# Altium PCB 003-00005.PcbDoc
Units mil, origin at the board's own origin, x right, y up, seen from the top; angles counter-clockwise.
Board outline 1076.1 x 992.63 mil, 2 copper layers (Top Layer, Bottom Layer); 3 components, 34 nets, 100 pads, 12 vias.
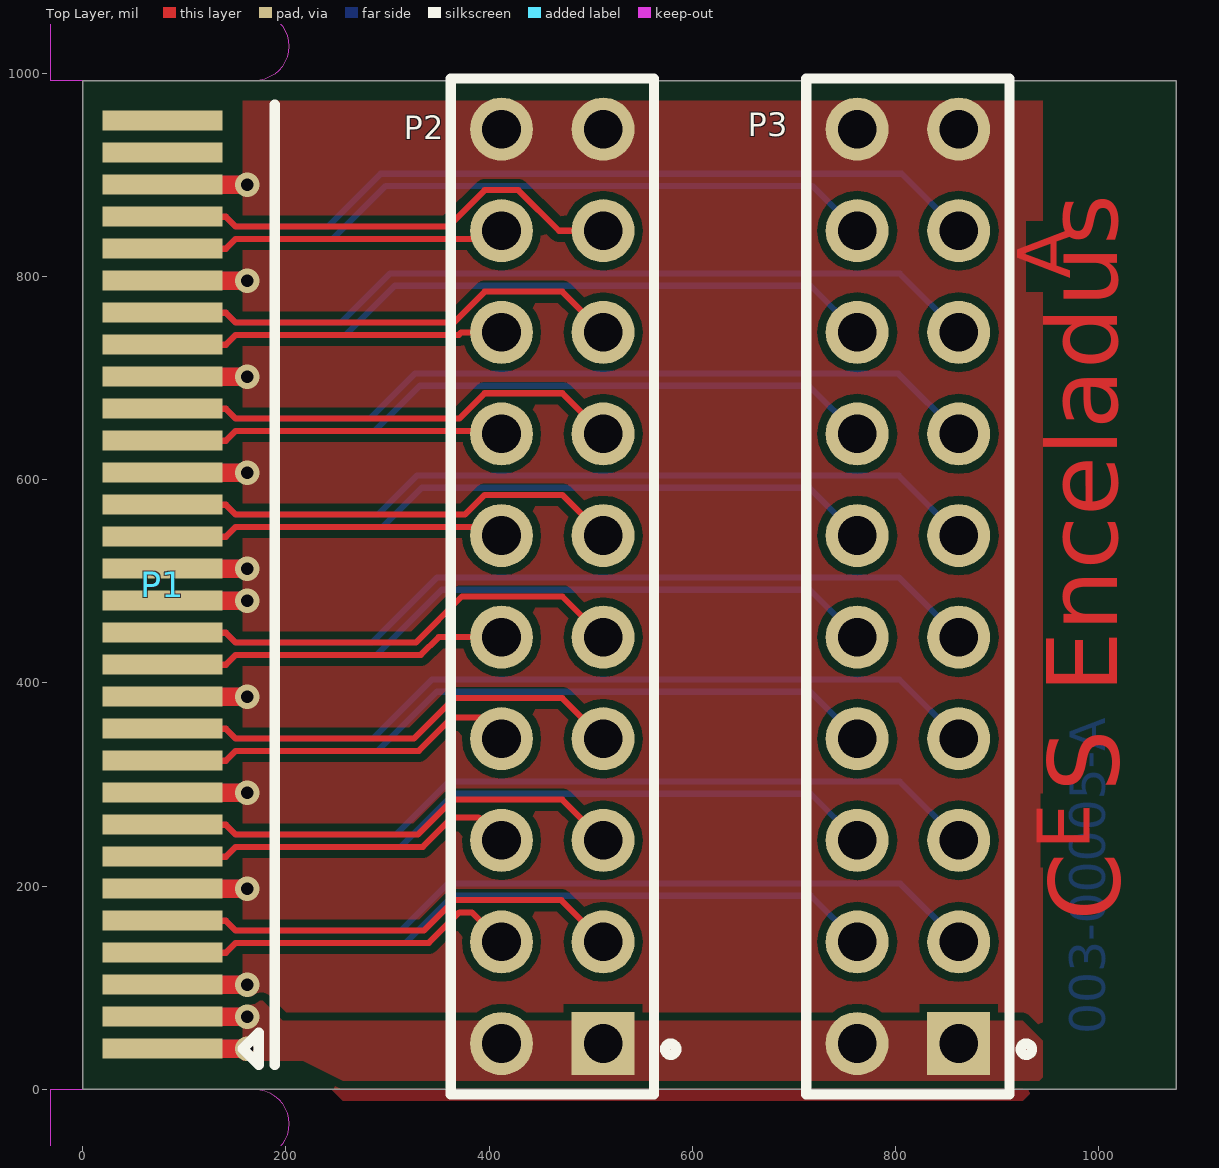
[diagram p0: Top Layer view]
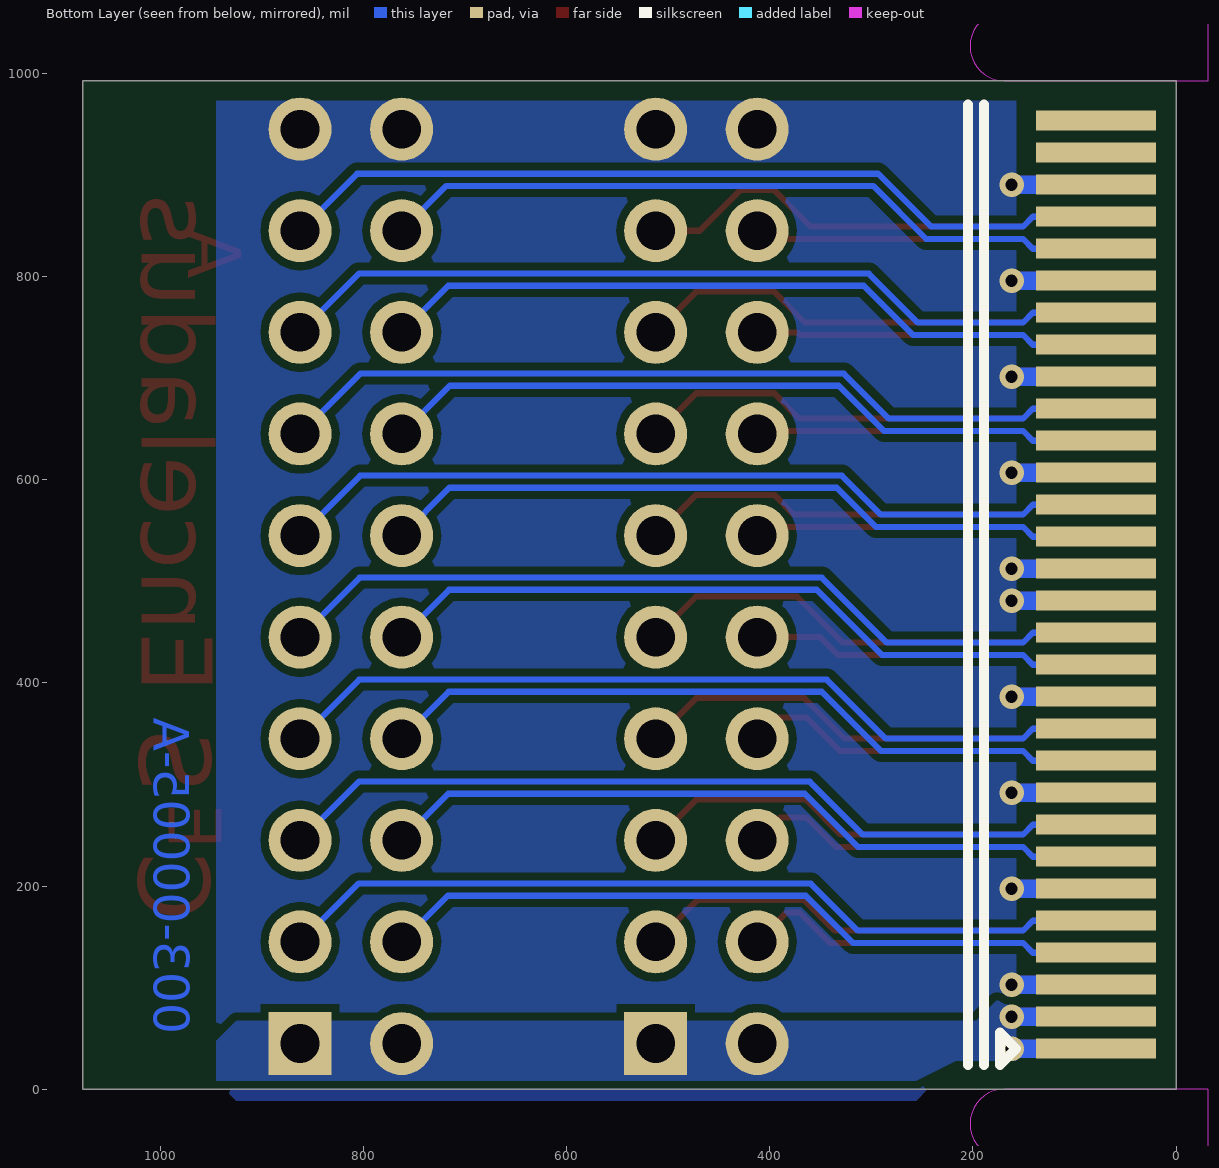
[diagram p1: Bottom Layer view, seen from below]

## Layer stack, top to bottom
Top Solder: solder mask 0.4, Solder Resist, Dk 3.5
Top Layer: signal copper 1.4
Dielectric1: core 12.6, FR-4, Dk 4.8
Bottom Layer: signal copper 1.4
Bottom Solder: solder mask 0.4, Solder Resist, Dk 3.5

## Board outline
0,0 1076.1,0 1076.1,992.63 0,992.63

## Design rules (kind name [scope] priority, off if disabled: settings)
Clearance Clearance_poly [InPolygon] p1: gap=8
Clearance [All] p2: gap=6
ComponentClearance [All] p1: gap=0 collisioncheckmode=3 verticalgap=0 showdistances=FALSE
DiffPairsRouting [All] p1: maxlimit=6 minlimit=6 mostfreqgap=6 toplayer_minwidth=6 toplayer_maxwidth=6 toplayer_prefwidth=6 bottomlayer_minwidth=6 bottomlayer_maxwidth=6 bottomlayer_prefwidth=6 maxuncoupledlength=500
HoleSize [All] p1: absolutevalues=TRUE maxlimit=500 minlimit=10 maxpercent=80.000 minpercent=20.000
HoleToHoleClearance [All] p1: gap=6 allowstackedmicrovias=TRUE
MinimumSolderMaskSliver [All] p1: minsoldermaskwidth=0
NetAntennae [not(InNet('PRSNTN'))] p1: netantennaetolerance=0
PlaneClearance [All] p1: clearance=10
PlaneConnect [All] p1: planeconnectstyle=Direct reliefexpansion=20 reliefentries=4 reliefconductorwidth=10 reliefairgap=10
PolygonConnect [All] p1: connectstyle=Direct reliefconductorwidth=10 reliefentries=4 polygonreliefangle="90 Angle" airgapwidth=10
RoutingCorners [All] p1: cornerstyle=45-Degree minsetback=30 maxsetback=30
RoutingVias [All] p1: holewidth=12 width=24 viastyle="Through Hole" minholewidth=12 minwidth=24 maxholewidth=28 maxwidth=50
SilkToSilkClearance [All] p1: silktosilkclearance=0
SilkToSolderMaskClearance SilkscreenOverComponentPads [IsPad] p1: minsilkscreentomaskgap=0 clearancetoexposedcopper=TRUE
SolderMaskExpansion [All] p1: expansion=4
UnpouredPolygon [All] p1: allowunpoured=FALSE
Width [All] p1: maxlimit=80 minlimit=6 preferedwidth=6 minimp=50.000000 maximp=50.000000 favimp=50.000000
18 further rules are at their usual default settings.

## Classes and differential pairs
differential pair D5: +D5_P -D5_N
differential pair D6: +D6_P -D6_N
differential pair D7: +D7_P -D7_N
differential pair D0: +D0_P -D0_N
differential pair D1: +D1_P -D1_N
differential pair D2: +D2_P -D2_N
differential pair D3: +D3_P -D3_N
differential pair D4: +D4_P -D4_N
differential pair D8: +D8_P -D8_N
differential pair D9: +D9_P -D9_N
differential pair D10: +D10_P -D10_N
differential pair D11: +D11_P -D11_N
differential pair D12: +D12_P -D12_N
differential pair D13: +D13_P -D13_N
differential pair D14: +D14_P -D14_N
differential pair D15: +D15_P -D15_N

## Components (designator, comment, footprint, x,y, rotation, side; value= is the part's Value field where it differs from the comment)
P1 "" 005-00024 78.74,811.53 r90 top
P2 "004-00012" 005-00014 462.2,494.98 r90 top
P3 "004-00012" 005-00014 812.2,494.98 r90 top

## Footprints (in the part's own frame and the unit in brackets; to place one, negate y for a bottom-side part, rotate by r counter-clockwise, add the part's x,y. Pads: shape width x height; smd on the part's side, far side on the other; paste and mask are expansions set on the pad)
005-00014 [mil] "2x10 100mil header"
  rect 62x62 / inner round 62 / far side rect 62x62 hole 38: 1(-450,-50)
  round 62 hole 38: 2(-450,50) 3(-350,-50) 4(-350,50) 5(-250,-50) 6(-250,50) 7(-150,-50) 8(-150,50) 9(-50,-50) 10(-50,50) 11(50,-50) 12(50,50) 13(150,-50) 14(150,50) 15(250,-50) 16(250,50) 17(350,-50) 18(350,50) 19(450,-50) 20(450,50)
  silkscreen extent -500,-100 500,100, body extent -500,-100 500,100, height 270
005-00024 [mm]
  rect 0.5x3 smd far side paste-0.5: 1(-19.6,0) 3(-18.8,0) 5(-18,0) 7(-17.2,0) 9(-16.4,0) 11(-15.6,0) 13(-14.8,0) 15(-14,0) 17(-13.2,0) 19(-12.4,0) 21(-11.6,0) 23(-10.8,0) 25(-10,0) 27(-9.2,0) 29(-8.4,0) 31(-7.6,0) 33(-6.8,0) 35(-6,0) 37(-5.2,0) 39(-4.4,0) 41(-3.6,0) 43(-2.8,0) 45(-2,0) 47(-1.2,0) 49(-0.4,0) 51(0.4,0) 53(1.2,0) 55(2,0) 57(2.8,0) 59(3.6,0)
  rect 0.5x3 smd paste-0.5: 2(-19.6,0) 4(-18.8,0) 6(-18,0) 8(-17.2,0) 10(-16.4,0) 12(-15.6,0) 14(-14.8,0) 16(-14,0) 18(-13.2,0) 20(-12.4,0) 22(-11.6,0) 24(-10.8,0) 26(-10,0) 28(-9.2,0) 30(-8.4,0) 32(-7.6,0) 34(-6.8,0) 36(-6,0) 38(-5.2,0) 40(-4.4,0) 42(-3.6,0) 44(-2.8,0) 46(-2,0) 48(-1.2,0) 50(-0.4,0) 52(0.4,0) 54(1.2,0) 56(2,0) 58(2.8,0) 60(3.6,0)
  Keep-Out Layer board cut-out: -22.34,2.8 -20.621,2.8 -20.615,2.794 -20.615,-2.283 -20.613,-2.286 -20.679,-2.616 -20.866,-2.897 -21.146,-3.084 -21.476,-3.15 -21.476,-3.15 -21.479,-3.15 -21.808,-3.084 -22.088,-2.897 -22.274,-2.618 -22.34,-2.289 -22.34,-2.289
  Keep-Out Layer board cut-out: 4.6,2.8 6.319,2.8 6.325,2.794 6.325,-2.283 6.327,-2.286 6.261,-2.616 6.074,-2.897 5.794,-3.084 5.464,-3.15 5.464,-3.15 5.461,-3.15 5.132,-3.084 4.852,-2.897 4.666,-2.618 4.6,-2.289 4.6,-2.289
  silkscreen extent -20,-2.8 4,-2

## Part data
P1: library part 008-00005, "Connector, PCB edge, MEC8, 30x2 Pin"
P2 P3: library part 017-00011, "CONN RCPT 2x10"

## Via types
v1: diameter 24, hole 12, Top Layer to Bottom Layer, 12 vias

## Nets (pads, with @x,y where several pads share a name; then routed paths per layer and width w, separated by ;. In a path a pad name is that pad's centre, name@x,y a point inside that pad or via, vN(x,y) a via of type N, cw(c..) or ccw(c..) an arc to the next point about the centre after c; other vN are vias at no path point)
3.3V: P1.1 P1.2 P1.3 P1.4 P2.1 P2.2 P3.1 P3.2 | length 332.4
  Top Layer w18: P1.2 v1(161.85,39.87) ; P1.4 v1(161.85,71.37)
  Bottom Layer w18: P1.1 v1(161.85,39.87) ; P1.3 v1(161.85,71.37)
D0_N: P1.10 P2.3 | length 467
  Top Layer w6: P1.10 140.9,165.86 150.64,156.11 335.72,156.11 365.72,186.11 471.08,186.11 P2.3
D0_P: P1.8 P2.4 | length 362
  Top Layer w6: P1.8 140.9,134.36 150.64,144.11 340.7,144.11 370.69,174.11 383.08,174.11 P2.4
D1_N: P1.16 P2.5 | length 468.3
  Top Layer w6: P1.16 140.9,260.35 150.64,250.6 329.82,250.6 364.2,284.98 472.2,284.98 P2.5
D1_P: P1.14 P2.6 | length 358.9
  Top Layer w6: P1.14 140.9,228.85 150.64,238.6 334.79,238.6 363.8,267.61 389.57,267.61 P2.6
D2_N: P1.22 P2.7 | length 470.6
  Top Layer w6: P1.22 140.9,354.83 150.64,345.09 325.88,345.09 365.77,384.98 472.2,384.98 P2.7
D2_P: P1.20 P2.8 | length 359.9
  Top Layer w6: P1.20 140.9,323.34 150.64,333.09 330.85,333.09 363.8,366.03 391.15,366.03 P2.8
D3_N: P1.28 P2.9 | length 472.9
  Top Layer w6: P1.28 140.9,449.32 150.64,439.57 327.85,439.57 373.25,484.98 472.2,484.98 P2.9
D3_P: P1.26 P2.10 | length 344.7
  Top Layer w6: P1.26 140.9,417.83 150.64,427.57 332.82,427.57 350.22,444.98 P2.10
D4_N: P1.36 P2.11 | length 462.1
  Top Layer w6: P1.36 140.9,575.31 150.64,565.56 376.21,565.56 395.63,584.98 472.2,584.98 P2.11
D4_P: P1.34 P2.12 | length 341.1
  Top Layer w6: P1.34 140.9,543.81 150.64,553.56 403.62,553.56 P2.12
D5_N: P1.42 P2.13 | length 464.4
  Top Layer w6: P1.42 140.9,669.8 150.64,660.05 370.7,660.05 395.63,684.98 472.2,684.98 P2.13
D5_P: P1.40 P2.14 | length 338.8
  Top Layer w6: P1.40 140.9,638.3 150.64,648.05 409.13,648.05 P2.14
D6_N: P1.48 P2.15 | length 466.7
  Top Layer w6: P1.48 140.9,764.28 150.64,754.54 365.19,754.54 395.63,784.98 472.2,784.98 P2.15
D6_P: P1.46 P2.16 | length 338.5
  Top Layer w6: P1.46 140.9,732.79 150.64,742.54 370.16,742.54 372.6,744.98 P2.16
D7_N: P1.54 P2.17 | length 469
  Top Layer w6: P1.54 140.9,858.77 150.64,849.02 359.68,849.02 395.63,884.98 428.77,884.98 468.77,844.98 P2.17
D7_P: P1.52 P2.18 | length 340.8
  Top Layer w6: P1.52 140.9,827.28 150.64,837.02 404.25,837.02 P2.18
D8_N: P1.9 P3.3 | length 830.5
  Bottom Layer w6: P1.9 140.9,165.86 150.64,156.11 313.09,156.11 359.44,202.46 804.72,202.46 P3.3
D8_P: P1.7 P3.4 | length 725.5
  Bottom Layer w6: P1.7 140.9,134.36 150.64,144.11 318.06,144.11 364.41,190.46 716.72,190.46 P3.4
D9_N: P1.15 P3.5 | length 833.1
  Bottom Layer w6: P1.15 140.9,260.35 150.64,250.6 308.17,250.6 360.43,302.86 804.32,302.86 P3.5
D9_P: P1.13 P3.6 | length 728.2
  Bottom Layer w6: P1.13 140.9,228.85 150.64,238.6 313.14,238.6 365.4,290.86 716.32,290.86 P3.6
D10_N: P1.21 P3.7 | length 835.7
  Bottom Layer w6: P1.21 140.9,354.83 150.64,345.09 285.53,345.09 343.69,403.25 803.93,403.25 P3.7
D10_P: P1.19 P3.8 | length 730.8
  Bottom Layer w6: P1.19 140.9,323.34 150.64,333.09 290.5,333.09 348.66,391.25 715.93,391.25 P3.8
D11_N: P1.27 P3.9 | length 838.3
  Bottom Layer w6: P1.27 140.9,449.32 150.64,439.57 284.54,439.57 348.61,503.65 803.53,503.65 P3.9
D11_P: P1.25 P3.10 | length 733.4
  Bottom Layer w6: P1.25 140.9,417.83 150.64,427.57 289.51,427.57 353.58,491.65 715.53,491.65 P3.10
D12_N: P1.35 P3.11 | length 827.9
  Bottom Layer w6: P1.35 140.9,575.31 150.64,565.56 290.45,565.56 328.93,604.04 803.14,604.04 P3.11
D12_P: P1.33 P3.12 | length 722.9
  Bottom Layer w6: P1.33 140.9,543.81 150.64,553.56 295.42,553.56 333.9,592.04 715.14,592.04 P3.12
D13_N: P1.41 P3.13 | length 830.5
  Bottom Layer w6: P1.41 140.9,669.8 150.64,660.05 282.57,660.05 326.96,704.43 802.75,704.43 P3.13
D13_P: P1.39 P3.14 | length 725.5
  Bottom Layer w6: P1.39 140.9,638.3 150.64,648.05 287.55,648.05 331.93,692.43 714.75,692.43 P3.14
D14_N: P1.47 P3.15 | length 831.5
  Bottom Layer w6: P1.47 140.9,764.28 150.64,754.54 254.03,754.54 302.35,802.86 804.32,802.86 P3.15
D14_P: P1.45 P3.16 | length 726.5
  Bottom Layer w6: P1.45 140.9,732.79 150.64,742.54 259,742.54 307.33,790.86 716.32,790.86 P3.16
D15_N: P1.53 P3.17 | length 832.3
  Bottom Layer w6: P1.53 140.9,858.77 150.64,849.02 241.14,849.02 293.21,901.09 432.09,901.09 806.09,901.09 P3.17
D15_P: P1.51 P3.18 | length 727.3
  Bottom Layer w6: P1.51 140.9,827.28 150.64,837.02 241.14,837.02 246.11,837.02 298.18,889.09 432.09,889.09 718.09,889.09 P3.18
GND: P1.5 P1.6 P1.11 P1.12 P1.17 P1.18 P1.23 P1.24 P1.29 P1.30 P1.31 P1.32 P1.37 P1.38 P1.43 P1.44 P1.49 P1.50 P1.55 P1.56 P2.19 P2.20 P3.19 P3.20 | length 1662.2
  Top Layer w18: P1.6 v1(161.85,102.87) ; P1.12 v1(161.85,197.35) ; P1.18 v1(161.85,291.84) ; P1.24 v1(161.85,386.33) ; P1.30 v1(161.85,480.82) ; P1.32 v1(161.85,512.31) ; P1.38 v1(161.85,606.8) ; P1.44 v1(161.85,701.29) ; P1.50 v1(161.85,795.78) ; P1.56 v1(161.85,890.27)
  Bottom Layer w18: P1.5 v1(161.85,102.87) ; P1.11 v1(161.85,197.35) ; P1.17 v1(161.85,291.84) ; P1.23 v1(161.85,386.33) ; P1.29 v1(161.85,480.82) ; P1.31 v1(161.85,512.31) ; P1.37 v1(161.85,606.8) ; P1.43 v1(161.85,701.29) ; P1.49 v1(161.85,795.78) ; P1.55 v1(161.85,890.27)
pads on no net: P1.57 P1.58 P1.59 P1.60

## Polygon pours and split planes (outlines as drawn)
3.3V on Top Layer "Top Layer-3.3V" (solid, pour order 6): 157.48,130.86 157.48,28.06 216.54,28.06 255.91,8.39 925.2,8.39 944.88,8.38 944.88,47.75 925.2,67.43 531.5,67.43 334.65,67.43 196.85,67.43 177.17,87.12 157.48,87.12 157.48,28.06
GND on Top Layer "Top Layer-GND" (solid, pour order 8): 157.48,972.94 216.54,972.95 255.91,972.95 610.24,972.95 925.2,972.95 944.88,972.95 944.88,638.3 944.88,402.08 944.88,8.38 925.2,-11.31 295.28,-11.31 255.91,-11.31 216.54,28.06 157.48,28.06
GND on Bottom Layer "Bottom Layer-GND" (solid, pour order 7): 157.48,972.94 216.54,972.94 255.91,972.95 610.24,972.95 925.2,972.95 944.88,972.95 944.88,638.3 944.88,402.08 944.88,8.38 925.2,-11.3 295.28,-11.31 255.91,-11.31 216.54,28.06 157.48,28.06
3.3V on Bottom Layer "Bottom Layer-3.3V" (solid, pour order 5): 157.48,130.86 157.48,28.06 216.54,28.06 255.91,8.39 925.2,8.39 944.88,8.39 944.88,47.75 925.2,67.43 531.5,67.43 334.65,67.43 196.85,67.43 177.17,87.12 157.48,87.12 157.48,28.06

## Other copper
Top Layer:
  text "A" at 989.45,797.55 h90 r90
  text "Enceladus" at 1041.34,389.76 h120 r90
  text "S" at 1042.99,292.84 h120 r90
  text "E" at 1008.54,235.75 h90 r90
  text "C" at 1043.92,165.99 h120 r90
Bottom Layer:
  text "003-00005-A" at 1018.09,54.05 h60 r90

## Silkscreen, mask and mechanical layers (free items; w line width, h text height)
Top Overlay:
  circle w10: c578.74,39.37 r5.57
  circle w10: c928.74,39.37 r5.57
Top Solder:
  text "Enceladus" at 1041.34,389.76 h120 r90
  text "S" at 1043.11,294.14 h120 r90
  text "E" at 1008.92,236.61 h90 r90
  text "C" at 1043.92,165.99 h120 r90
Board Outline To Gerbers:
  lines w10: 0,0 168.66,0 168.74,0.29 170.97,0 1076.1,0 1076.1,992.63 171.07,992.63 168.84,992.34 168.84,992.63 0,992.63 0,0
Board Outline To Edit:
  the board outline again, w10